# Altium PCB SeniorProjectPCB.PcbDoc
Units mil, origin at the board's own origin, x right, y up, seen from the top; angles counter-clockwise.
Board outline 6000 x 4000 mil, 2 copper layers (Top Layer, Bottom Layer); 68 components, 187 nets, 451 pads, 0 vias.
Unrouted connection lines stored in the file: 213.
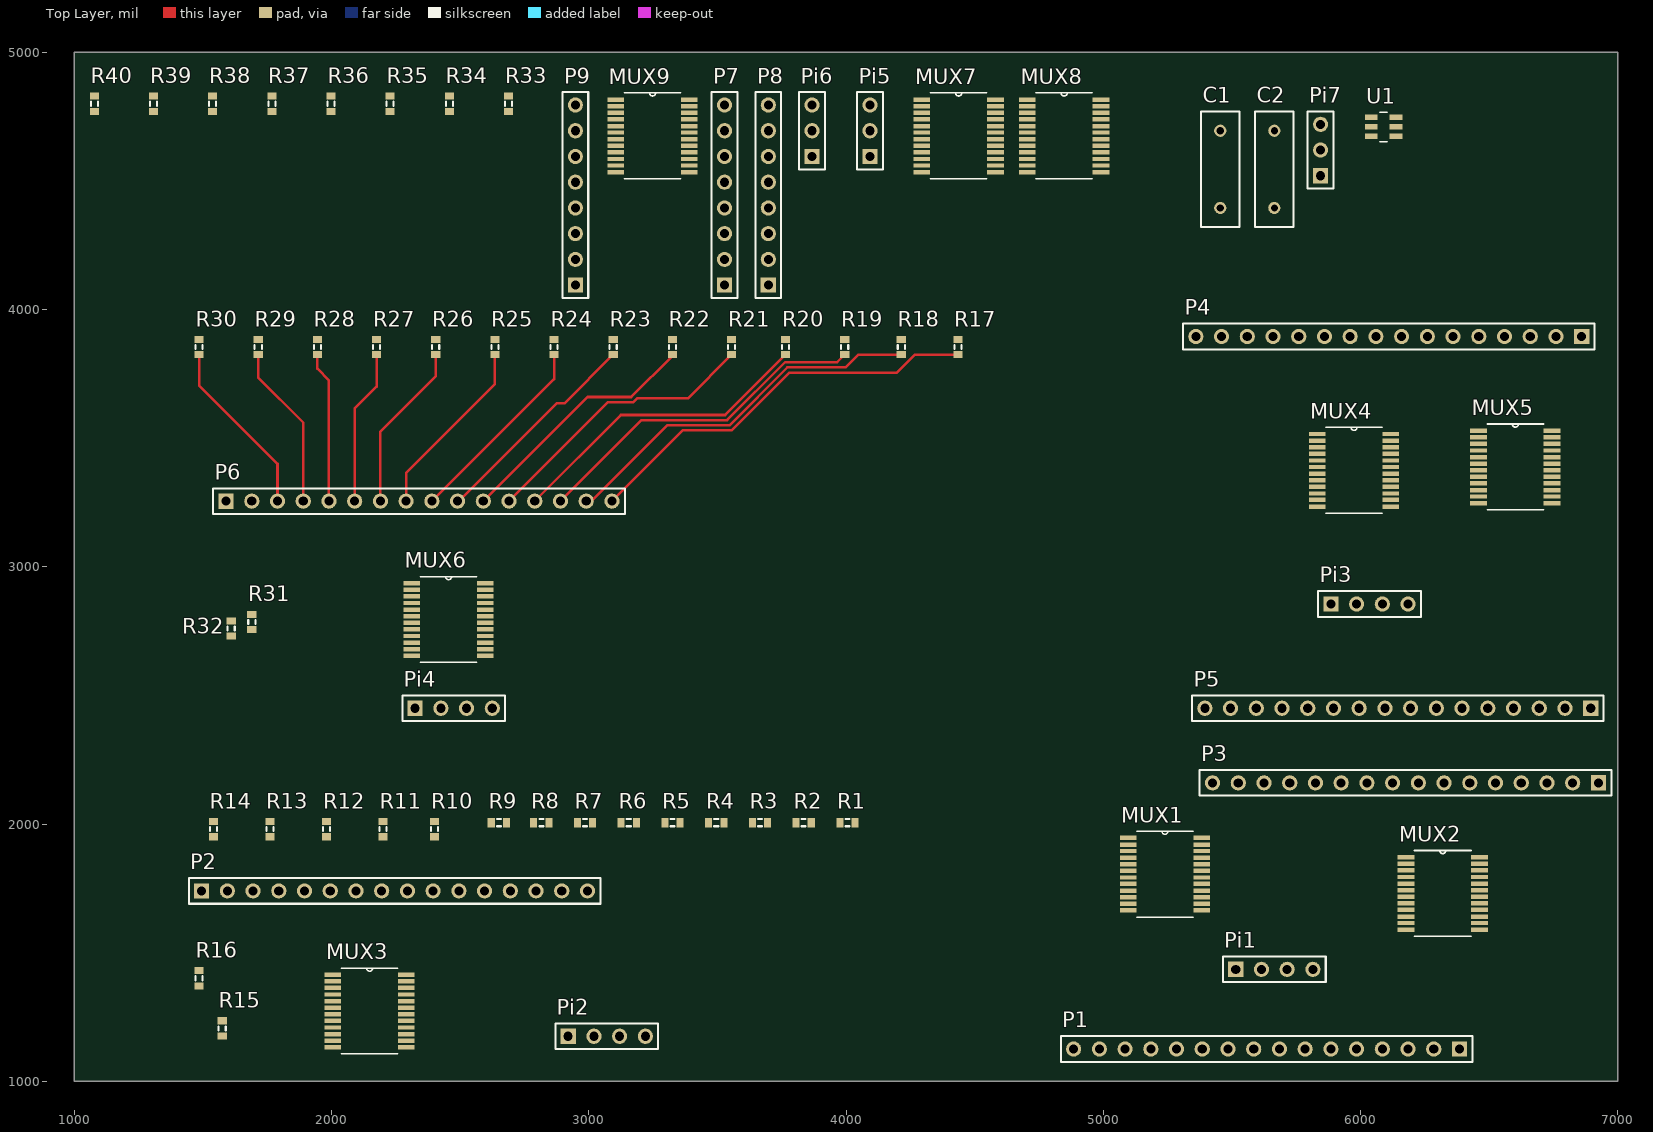
[diagram p0: Top Layer view]
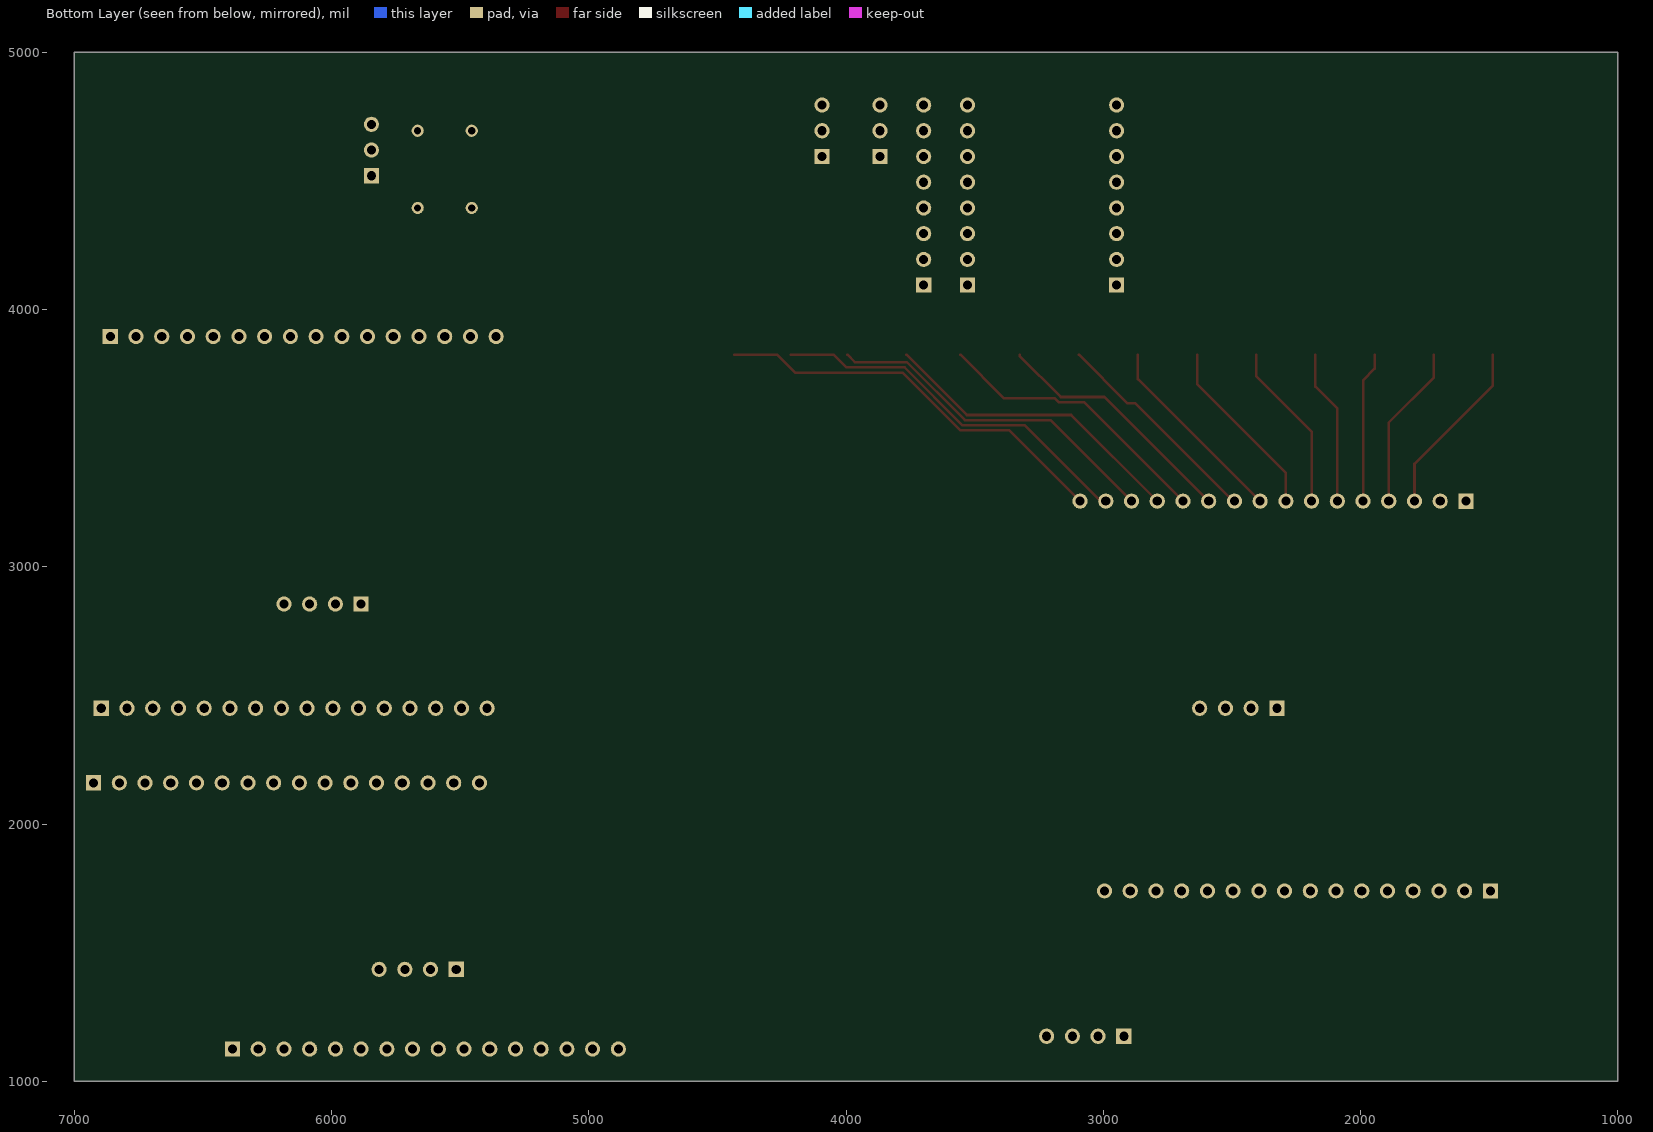
[diagram p1: Bottom Layer view, seen from below]

## Layer stack, top to bottom
Top Solder: solder mask 0.4, Solder Resist, Dk 3.5
Top Layer: signal copper 1.4
Dielectric 1: dielectric 12.6, FR-4, Dk 4.8
Bottom Layer: signal copper 1.4
Bottom Solder: solder mask 0.4, Solder Resist, Dk 3.5

## Board outline
1000,1000 7000,1000 7000,5000 1000,5000

## Design rules (kind name [scope] priority, off if disabled: settings)
Clearance [All] p1: gap=10 ignorepadtopadclearanceinfootprint=FALSE except(0: Arc-Hole Track-Hole SMDPad-Hole THPad-Hole Via-Hole Fill-Hole Poly-Hole Region-Hole Text-Hole)
PolygonConnect [All] p1: connectstyle=Relief reliefconductorwidth=10 reliefentries=4 polygonreliefangle="90 Angle" airgapwidth=10
RoomDefinition SigCapture2 [InComponentClass('SigCapture2')] p1: confinementstyle=ConfineIn formatcopy=TRUE lockcomponents=FALSE outline 1015,2289.53 6960,2289.53 6960,4009.53 1015,4009.53
RoomDefinition SigCapture3 [InComponentClass('SigCapture3')] p2: confinementstyle=ConfineIn formatcopy=TRUE lockcomponents=FALSE outline 1048,4035 5033,4035 5033,4955 1048,4955
RoomDefinition SigCapture1 [InComponentClass('SigCapture1')] p3: confinementstyle=ConfineIn formatcopy=TRUE lockcomponents=FALSE outline 1015,1045 6990,1045 6990,2250 1015,2250
RoomDefinition ADC [InComponentClass('ADC')] p4: confinementstyle=ConfineIn formatcopy=TRUE lockcomponents=FALSE outline 5370,4310 6175,4310 6175,4880 5370,4880
RoutingVias [All] p1: holewidth=28 width=50 viastyle="Through Hole" minholewidth=28 minwidth=50 maxholewidth=28 maxwidth=50
SolderMaskExpansion [All] p1: expansion=4
Width [All] p1: maxlimit=10 minlimit=10 preferedwidth=10
30 further rules are at their usual default settings.

## Classes and differential pairs
component class SigCapture3: MUX7 MUX8 MUX9 P7 P8 P9 Pi5 Pi6 R33 R34 R35 R36 R37 R38 R39 R40
component class SigCapture2: MUX4 MUX5 MUX6 P4 P5 P6 Pi3 Pi4 R17 R18 R19 R20 R21 R22 R23 R24 R25 R26 R27 R28 R29 R30 R31 R32
component class SigCapture1: MUX1 MUX2 MUX3 P1 P2 P3 Pi1 Pi2 R1 R2 R3 R4 R5 R6 R7 R8 R9 R10 R11 R12 R13 R14 R15 R16
component class ADC: C1 C2 Pi7 U1

## Components (designator, comment, footprint, x,y, rotation, side; value= is the part's Value field where it differs from the comment)
C1 "Cap" RAD-0.3 5455,4545 r90 top value=100pF
C2 "Cap" RAD-0.3 5665,4545 r90 top value=1uF
MUX1 "CD74HC4067SM96" SOP65P780X200-24N 5240,1805 r0 top
MUX2 "CD74HC4067SM96" SOP65P780X200-24N 6320,1730 r0 top
MUX3 "CD74HC4067SM96" SOP65P780X200-24N 2148,1273 r0 top
MUX4 "CD74HC4067SM96" SOP65P780X200-24N 5975,3375 r0 top
MUX5 "CD74HC4067SM96" SOP65P780X200-24N 6602,3388 r0 top
MUX6 "CD74HC4067SM96" SOP65P780X200-24N 2455,2795 r0 top
MUX7 "CD74HC4067SM96" SOP65P780X200-24N 4438,4675 r0 top
MUX8 "CD74HC4067SM96" SOP65P780X200-24N 4848,4675 r0 top
MUX9 "CD74HC4067SM96" SOP65P780X200-24N 3248,4675 r0 top
P1 "Header 16" HDR1X16 6385,1125 r180 top
P2 "Header 16" HDR1X16 1495,1740 r0 top
P3 "Header 16" HDR1X16 6925,2160 r180 top
P4 "Header 16" HDR1X16 6860,3895 r180 top
P5 "Header 16" HDR1X16 6895,2450 r180 top
P6 "Header 16" HDR1X16 1590,3255 r0 top
P7 "Header 8" HDR1X8 3528,4095 r90 top
P8 "Header 8" HDR1X8 3698,4095 r90 top
P9 "Header 8" HDR1X8 2948,4095 r90 top
Pi1 "Header 4" HDR1X4 5515,1435 r0 top
Pi2 "Header 4" HDR1X4 2920,1175 r0 top
Pi3 "Header 4" HDR1X4 5885,2855 r0 top
Pi4 "Header 4" HDR1X4 2325,2450 r0 top
Pi5 "Header 3" HDR1X3 4093,4595 r90 top
Pi6 "Header 3" HDR1X3 3868,4595 r90 top
Pi7 "Header 3" HDR1X3 5845,4520 r90 top
R1 "Res3" J1-0603 4005.47,2005 r0 top value=500
R2 "Res3" J1-0603 3835.47,2005 r0 top value=500
R3 "Res3" J1-0603 3665.47,2005 r0 top value=500
R4 "Res3" J1-0603 3495.47,2005 r0 top value=500
R5 "Res3" J1-0603 3325.47,2005 r0 top value=500
R6 "Res3" J1-0603 3155.47,2005 r0 top value=500
R7 "Res3" J1-0603 2985.47,2005 r0 top value=500
R8 "Res3" J1-0603 2815.47,2005 r0 top value=500
R9 "Res3" J1-0603 2650.47,2005 r0 top value=500
R10 "Res3" J1-0603 2400.47,1980 r90 top value=500
R11 "Res3" J1-0603 2200.47,1980 r90 top value=500
R12 "Res3" J1-0603 1980.47,1980 r90 top value=500
R13 "Res3" J1-0603 1760.47,1980 r90 top value=500
R14 "Res3" J1-0603 1540.47,1980 r90 top value=500
R15 "Res3" J1-0603 1575,1205.47 r90 top value=500
R16 "Res3" J1-0603 1485,1400.47 r90 top value=500
R17 "Res3" J1-0603 4435,3854.53 r90 top value=500
R18 "Res3" J1-0603 4215,3854.53 r90 top value=500
R19 "Res3" J1-0603 3995,3854.53 r90 top value=500
R20 "Res3" J1-0603 3765,3854.53 r90 top value=500
R21 "Res3" J1-0603 3555,3854.53 r90 top value=500
R22 "Res3" J1-0603 3325,3854.53 r90 top value=500
R23 "Res3" J1-0603 3095,3854.53 r90 top value=500
R24 "Res3" J1-0603 2865,3854.53 r90 top value=500
R25 "Res3" J1-0603 2635,3854.53 r90 top value=500
R26 "Res3" J1-0603 2405,3854.53 r90 top value=500
R27 "Res3" J1-0603 2175,3854.53 r90 top value=500
R28 "Res3" J1-0603 1945,3854.53 r90 top value=500
R29 "Res3" J1-0603 1715,3854.53 r90 top value=500
R30 "Res3" J1-0603 1485,3854.53 r90 top value=500
R31 "Res3" J1-0603 1690,2785.47 r270 top value=500
R32 "Res3" J1-0603 1610,2760 r270 top value=500
R33 "Res3" J1-0603 2688,4800 r90 top value=500
R34 "Res3" J1-0603 2458,4800 r90 top value=500
R35 "Res3" J1-0603 2228,4800 r90 top value=500
R36 "Res3" J1-0603 1998,4800 r90 top value=500
R37 "Res3" J1-0603 1768,4800 r90 top value=500
R38 "Res3" J1-0603 1538,4800 r90 top value=500
R39 "Res3" J1-0603 1308,4800 r90 top value=500
R40 "Res3" J1-0603 1078,4800 r90 top value=500
U1 "ADC121S051CIMF" SOT95P284X122-6N 6090,4710 r0 top

## Footprints (in the part's own frame and the unit in brackets; to place one, negate y for a bottom-side part, rotate by r counter-clockwise, add the part's x,y. Pads: shape width x height; smd on the part's side, far side on the other; paste and mask are expansions set on the pad)
HDR1X3 [mm] "Connector; Header; 3 Position"
  rect 1.5x1.5 hole 0.9: 1(0,0)
  round 1.5 hole 0.9: 2(2.54,0) 3(5.08,0)
  silkscreen extent -1.27,-1.27 6.35,1.27
HDR1X4 [mm] "Connector; Header; 4 Position"
  rect 1.5x1.5 hole 0.9: 1(0,0)
  round 1.5 hole 0.9: 2(2.54,0) 3(5.08,0) 4(7.62,0)
  silkscreen extent -1.27,-1.27 8.89,1.27
HDR1X8 [mm] "Connector; Header; 8 Position"
  rect 1.5x1.5 hole 0.9: 1(0,0)
  round 1.5 hole 0.9: 2(2.54,0) 3(5.08,0) 4(7.62,0) 5(10.16,0) 6(12.7,0) 7(15.24,0) 8(17.78,0)
  silkscreen extent -1.27,-1.27 19.05,1.27
HDR1X16 [mm] "Connector; Header; 16 Position"
  rect 1.5x1.5 hole 0.9: 1(0,0)
  round 1.5 hole 0.9: 2(2.54,0) 3(5.08,0) 4(7.62,0) 5(10.16,0) 6(12.7,0) 7(15.24,0) 8(17.78,0) 9(20.32,0) 10(22.86,0) 11(25.4,0) 12(27.94,0) 13(30.48,0) 14(33.02,0) 15(35.56,0) 16(38.1,0)
  silkscreen extent -1.27,-1.27 39.37,1.27
J1-0603 [mm] "Chip Resistor, Body 1.6x0.8mm, IPC High Density"
  rect 0.7x0.9 smd: 1(-0.75,0) 2(0.75,0)
  silkscreen extent -0.2,-0.35 0.2,0.35, body extent -0.85,-0.48 0.85,0.48, height 0.9
RAD-0.3 [mm] "Radial Cap, Thru-Hole; 2 Leads; 0.3 in Pin Spacing"
  round 1.2 hole 0.7: 1(-3.81,0) 2(3.81,0)
  silkscreen extent -5.71,-1.91 5.71,1.91
SOP65P780X200-24N [mil]
  rect 65x17 smd: 1(-143,141) 2(-143,115) 3(-143,90) 4(-143,64) 5(-143,38) 6(-143,13) 7(-143,-13) 8(-143,-38) 9(-143,-64) 10(-143,-90) 11(-143,-115) 12(-143,-141) 13(143,-141) 14(143,-115) 15(143,-90) 16(143,-64) 17(143,-38) 18(143,-13) 19(143,13) 20(143,38) 21(143,64) 22(143,90) 23(143,115) 24(143,141)
  silkscreen extent -110,-167 110,167
SOT95P284X122-6N [mil]
  rect 50x21 smd: 1(-48,37) 2(-48,0) 3(-48,-37) 4(48,-37) 5(48,0) 6(48,37)
  silkscreen extent -14,-57 14,57

## Part data
C1 C2: "Capacitor", LatestRevisionDate=17-Jul-2002, LatestRevisionNote="Re-released for DXP Platform.", PackageDescription="Radial Cap, Thru-Hole; 2 Leads; 0.3 in Pin Spacing", PackageReference=RAD-0.3, Published=8-Jun-2000, Publisher="Altium Limited"
MUX1 MUX2 MUX3 MUX4 MUX5 MUX6 MUX7 MUX8 MUX9: "High Speed CMOS 16-Channel Analog Multiplexer/Demultiplexer 24-SSOP -55 to 125", Package="SSOP-24 Texas Instruments", Availability=Unavailable, MF="Texas Instruments", MP=CD74HC4067SM96, Price=None, SnapEDA_Link=https://www.snapeda.com/parts/CD74HC4067SM96/Texas%20Instruments/view-part/?ref=snap
P1 P2 P3 P4 P5 P6: "Header, 16-Pin", LatestRevisionDate=17-Jul-2002, LatestRevisionNote="Re-released for DXP Platform.", Publisher="Altium Limited"
P7 P8 P9: "Header, 8-Pin", LatestRevisionDate=17-Jul-2002, LatestRevisionNote="Re-released for DXP Platform.", Publisher="Altium Limited"
Pi1 Pi2 Pi3 Pi4: "Header, 4-Pin", LatestRevisionDate=17-Jul-2002, LatestRevisionNote="Re-released for DXP Platform.", Publisher="Altium Limited"
Pi5 Pi6 Pi7: "Header, 3-Pin", LatestRevisionDate=17-Jul-2002, LatestRevisionNote="Re-released for DXP Platform.", Publisher="Altium Limited"
R1 R2 R3 R4 R5 R6 R7 R8 R9 R10 R11 R12 R13 R14 R15 R16 R17 R18 R19 R20 R21 R22 R23 R24 R25 R26 R27 R28 R29 R30 R31 R32 R33 R34 R35 R36 R37 R38 R39 R40: "Resistor", LatestRevisionDate=29-May-2009, LatestRevisionNote="IPC-7351 Footprint Added.", PackageDescription="Chip Resistor", PackageReference=J1-0603, Published=8-Jun-2000, Publisher="Altium Limited"
U1: "Single Channel, 200 to 500 ksps, 12-Bit A/D Converter 6-SOT-23 -40 to 85", Package="SOT-23 Texas Instruments", Availability=Unavailable, MF="Texas Instruments", MP=ADC121S051CIMF/NOPB, Price=None, SnapEDA_Link=https://www.snapeda.com/parts/ADC121S051CIMF/NOPB/Texas%20Instruments/view-part/?ref=snap

## Nets (pads, with @x,y where several pads share a name; then routed paths per layer and width w, separated by ;. In a path a pad name is that pad's centre, name@x,y a point inside that pad or via, vN(x,y) a via of type N, cw(c..) or ccw(c..) an arc to the next point about the centre after c; other vN are vias at no path point)
GND: C1.2 C2.1 MUX1.1 MUX1.12 MUX2.12 MUX3.12 MUX4.1 MUX4.12 MUX5.12 MUX6.12 MUX7.1 MUX7.12 MUX8.12 MUX9.12 U1.2
io1: MUX1.10 Pi1.1
io2: MUX1.11 Pi1.2
io3: MUX1.14 Pi1.3
io4: MUX1.13 Pi1.4
io5: MUX2.10 MUX3.10 Pi2.1
io6: MUX2.11 MUX3.11 Pi2.2
io7: MUX2.14 MUX3.14 Pi2.3
io8: MUX2.13 MUX3.13 Pi2.4
io9: MUX4.10 Pi3.1
io10: MUX4.11 Pi3.2
io11: MUX4.14 Pi3.3
io12: MUX4.13 Pi3.4
io13: MUX5.10 MUX6.10 Pi4.1
io14: MUX5.11 MUX6.11 Pi4.2
io15: MUX5.14 MUX6.14 Pi4.3
io16: MUX5.13 MUX6.13 Pi4.4
io17: MUX7.10 Pi5.1
io18: MUX7.11 Pi5.2
io19: MUX7.14 Pi5.3
io20: MUX8.10 MUX9.10 Pi6.1
io21: MUX8.11 MUX9.11 Pi6.2
io22: MUX8.14 MUX9.14 Pi6.3
NetMUX1_2: MUX1.2 P1.9
NetMUX1_3: MUX1.3 P1.10
NetMUX1_4: MUX1.4 P1.11
NetMUX1_5: MUX1.5 P1.12
NetMUX1_6: MUX1.6 P1.13
NetMUX1_7: MUX1.7 P1.14
NetMUX1_8: MUX1.8 P1.15
NetMUX1_9: MUX1.9 P1.16
NetMUX1_16: MUX1.16 P1.1
NetMUX1_17: MUX1.17 P1.2
NetMUX1_18: MUX1.18 P1.3
NetMUX1_19: MUX1.19 P1.4
NetMUX1_20: MUX1.20 P1.5
NetMUX1_21: MUX1.21 P1.6
NetMUX1_22: MUX1.22 P1.7
NetMUX1_23: MUX1.23 P1.8
NetMUX2_2: MUX2.2 P3.9
NetMUX2_3: MUX2.3 P3.10
NetMUX2_4: MUX2.4 P3.11
NetMUX2_5: MUX2.5 P3.12
NetMUX2_6: MUX2.6 P3.13
NetMUX2_7: MUX2.7 P3.14
NetMUX2_8: MUX2.8 P3.15
NetMUX2_9: MUX2.9 P3.16
NetMUX2_16: MUX2.16 P3.1
NetMUX2_17: MUX2.17 P3.2
NetMUX2_18: MUX2.18 P3.3
NetMUX2_19: MUX2.19 P3.4
NetMUX2_20: MUX2.20 P3.5
NetMUX2_21: MUX2.21 P3.6
NetMUX2_22: MUX2.22 P3.7
NetMUX2_23: MUX2.23 P3.8
NetMUX3_2: MUX3.2 R8.2
NetMUX3_3: MUX3.3 R7.2
NetMUX3_4: MUX3.4 R6.2
NetMUX3_5: MUX3.5 R5.2
NetMUX3_6: MUX3.6 R4.2
NetMUX3_7: MUX3.7 R3.2
NetMUX3_8: MUX3.8 R2.2
NetMUX3_9: MUX3.9 R1.2
NetMUX3_16: MUX3.16 R16.2
NetMUX3_17: MUX3.17 R15.2
NetMUX3_18: MUX3.18 R14.2
NetMUX3_19: MUX3.19 R13.2
NetMUX3_20: MUX3.20 R12.2
NetMUX3_21: MUX3.21 R11.2
NetMUX3_22: MUX3.22 R10.2
NetMUX3_23: MUX3.23 R9.2
NetMUX4_2: MUX4.2 P4.9
NetMUX4_3: MUX4.3 P4.10
NetMUX4_4: MUX4.4 P4.11
NetMUX4_5: MUX4.5 P4.12
NetMUX4_6: MUX4.6 P4.13
NetMUX4_7: MUX4.7 P4.14
NetMUX4_8: MUX4.8 P4.15
NetMUX4_9: MUX4.9 P4.16
NetMUX4_16: MUX4.16 P4.1
NetMUX4_17: MUX4.17 P4.2
NetMUX4_18: MUX4.18 P4.3
NetMUX4_19: MUX4.19 P4.4
NetMUX4_20: MUX4.20 P4.5
NetMUX4_21: MUX4.21 P4.6
NetMUX4_22: MUX4.22 P4.7
NetMUX4_23: MUX4.23 P4.8
NetMUX5_2: MUX5.2 P5.9
NetMUX5_3: MUX5.3 P5.10
NetMUX5_4: MUX5.4 P5.11
NetMUX5_5: MUX5.5 P5.12
NetMUX5_6: MUX5.6 P5.13
NetMUX5_7: MUX5.7 P5.14
NetMUX5_8: MUX5.8 P5.15
NetMUX5_9: MUX5.9 P5.16
NetMUX5_16: MUX5.16 P5.1
NetMUX5_17: MUX5.17 P5.2
NetMUX5_18: MUX5.18 P5.3
NetMUX5_19: MUX5.19 P5.4
NetMUX5_20: MUX5.20 P5.5
NetMUX5_21: MUX5.21 P5.6
NetMUX5_22: MUX5.22 P5.7
NetMUX5_23: MUX5.23 P5.8
NetMUX6_2: MUX6.2 R24.2
NetMUX6_3: MUX6.3 R23.2
NetMUX6_4: MUX6.4 R22.2
NetMUX6_5: MUX6.5 R21.2
NetMUX6_6: MUX6.6 R20.2
NetMUX6_7: MUX6.7 R19.2
NetMUX6_8: MUX6.8 R18.2
NetMUX6_9: MUX6.9 R17.2
NetMUX6_16: MUX6.16 R32.2
NetMUX6_17: MUX6.17 R31.2
NetMUX6_18: MUX6.18 R30.2
NetMUX6_19: MUX6.19 R29.2
NetMUX6_20: MUX6.20 R28.2
NetMUX6_21: MUX6.21 R27.2
NetMUX6_22: MUX6.22 R26.2
NetMUX6_23: MUX6.23 R25.2
NetMUX7_2: MUX7.2 P7.1
NetMUX7_3: MUX7.3 P7.2
NetMUX7_4: MUX7.4 P7.3
NetMUX7_5: MUX7.5 P7.4
NetMUX7_6: MUX7.6 P7.5
NetMUX7_7: MUX7.7 P7.6
NetMUX7_8: MUX7.8 P7.7
NetMUX7_9: MUX7.9 P7.8
NetMUX8_2: MUX8.2 P8.1
NetMUX8_3: MUX8.3 P8.2
NetMUX8_4: MUX8.4 P8.3
NetMUX8_5: MUX8.5 P8.4
NetMUX8_6: MUX8.6 P8.5
NetMUX8_7: MUX8.7 P8.6
NetMUX8_8: MUX8.8 P8.7
NetMUX8_9: MUX8.9 P8.8
NetMUX9_2: MUX9.2 R40.2
NetMUX9_3: MUX9.3 R39.2
NetMUX9_4: MUX9.4 R38.2
NetMUX9_5: MUX9.5 R37.2
NetMUX9_6: MUX9.6 R36.2
NetMUX9_7: MUX9.7 R35.2
NetMUX9_8: MUX9.8 R34.2
NetMUX9_9: MUX9.9 R33.2
NetP2_1: P2.1 R16.1
NetP2_2: P2.2 R15.1
NetP2_3: P2.3 R14.1
NetP2_4: P2.4 R13.1
NetP2_5: P2.5 R12.1
NetP2_6: P2.6 R11.1
NetP2_7: P2.7 R10.1
NetP2_8: P2.8 R9.1
NetP2_9: P2.9 R8.1
NetP2_10: P2.10 R7.1
NetP2_11: P2.11 R6.1
NetP2_12: P2.12 R5.1
NetP2_13: P2.13 R4.1
NetP2_14: P2.14 R3.1
NetP2_15: P2.15 R2.1
NetP2_16: P2.16 R1.1
NetP6_1: P6.1 R32.1
NetP6_2: P6.2 R31.1
NetP6_3: P6.3 R30.1 | length 696.3
  Top Layer w10: R30.1 1485,3705 1790,3400 P6.3
NetP6_4: P6.4 R29.1 | length 642.5
  Top Layer w10: R29.1 1715,3735 1890,3560 P6.4
NetP6_5: P6.5 R28.1 | length 588.6
  Top Layer w10: R28.1 1945,3770 1990,3725 P6.5
NetP6_6: P6.6 R27.1 | length 605.2
  Top Layer w10: P6.6 2090,3615 2175,3700 R27.1
NetP6_7: P6.7 R26.1 | length 659.1
  Top Layer w10: P6.7 2190,3525 2405,3740 R26.1
NetP6_8: P6.8 R25.1 | length 712.9
  Top Layer w10: P6.8 2290,3365 2635,3710 R25.1
NetP6_9: P6.9 R24.1 | length 766.8
  Top Layer w10: P6.9 2865,3730 R24.1
NetP6_10: P6.10 R23.1 | length 841.1
  Top Layer w10: P6.10 2495,3255 2875,3635 2905,3635 R23.1
NetP6_11: P6.11 R22.1 | length 974
  Top Layer w10: P6.11 2995,3660 3165,3660 3325,3820 R22.1
NetP6_12: P6.12 R21.1 | length 1101.1
  Top Layer w10: P6.12 3075,3640 3173.28,3640 3188.28,3655 3385,3655 R21.1
NetP6_13: P6.13 R20.1 | length 1211.1
  Top Layer w10: P6.13 3125,3590 3530,3590 R20.1
NetP6_14: P6.14 R19.1 | length 1341.1
  Top Layer w10: P6.14 3205,3570 3538.28,3570 3763.28,3795 3965,3795 R19.1
NetP6_15: P6.15 R18.1 | length 1461.1
  Top Layer w10: P6.15 3010,3255 3305,3550 3546.57,3550 3771.57,3775 3997.71,3775 4047.71,3825 R18.1
NetP6_16: P6.16 R17.1 | length 1581.1
  Top Layer w10: P6.16 3365,3530 3554.85,3530 3779.85,3755 4197.71,3755 4267.71,3825 R17.1
NetP9_1: P9.1 R40.1
NetP9_2: P9.2 R39.1
NetP9_3: P9.3 R38.1
NetP9_4: P9.4 R37.1
NetP9_5: P9.5 R36.1
NetP9_6: P9.6 R35.1
NetP9_7: P9.7 R34.1
NetP9_8: P9.8 R33.1
NetPi7_1: Pi7.1 U1.4
NetPi7_2: Pi7.2 U1.5
NetPi7_3: Pi7.3 U1.6
VCC: C1.1 C2.2 MUX1.24 MUX2.1 MUX2.24 MUX3.1 MUX3.24 MUX4.24 MUX5.1 MUX5.24 MUX6.1 MUX6.24 MUX7.24 MUX8.1 MUX8.24 MUX9.1 MUX9.24 U1.1
pads on no net: MUX1.15 MUX2.15 MUX3.15 MUX4.15 MUX5.15 MUX6.15 MUX7.13 MUX7.15 MUX7.16 MUX7.17 MUX7.18 MUX7.19 MUX7.20 MUX7.21 MUX7.22 MUX7.23 MUX8.13 MUX8.15 MUX8.16 MUX8.17 MUX8.18 MUX8.19 MUX8.20 MUX8.21 MUX8.22 MUX8.23 MUX9.13 MUX9.15 MUX9.16 MUX9.17 MUX9.18 MUX9.19 MUX9.20 MUX9.21 MUX9.22 MUX9.23 U1.3